# Altium PCB realy_ac_panel.PcbDoc
Units mm, origin at the board's own origin, x right, y up, seen from the top; angles counter-clockwise.
Board outline 129 x 103 mm, 6 copper layers (Top Layer, GND, Inner, Inner2, Power, Bottom Layer), stack 0.815 mm thick; 6 components, 77 nets, 6 pads, 4 vias.
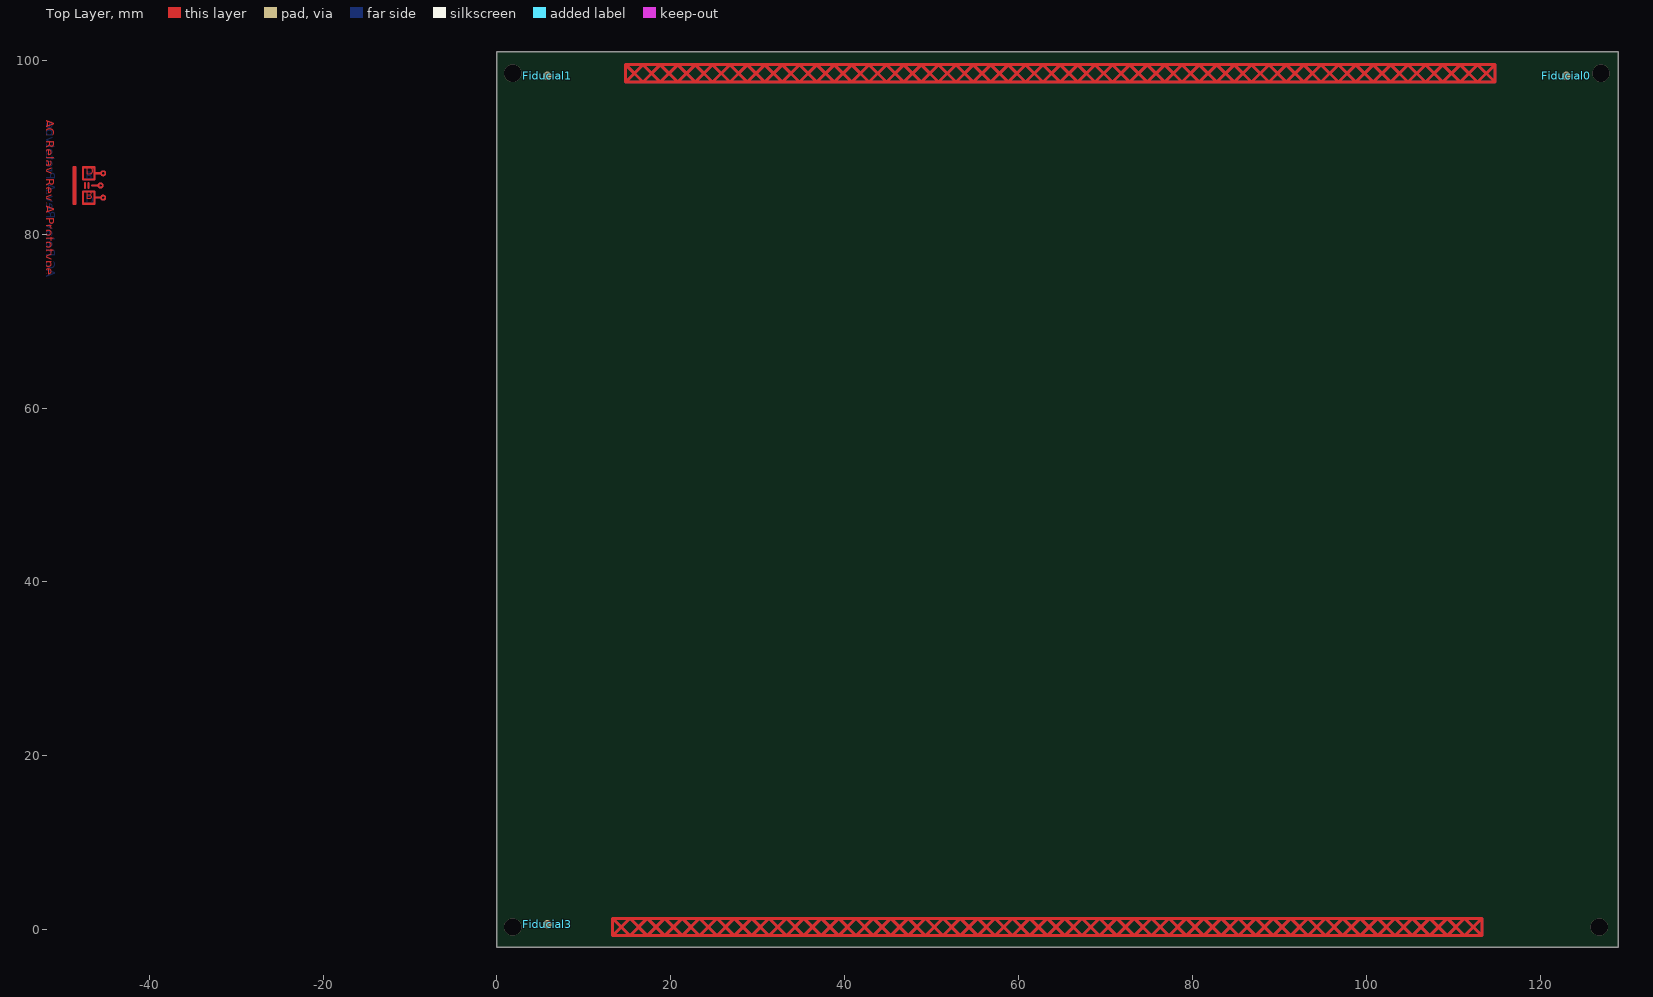
[diagram p0: Top Layer view]
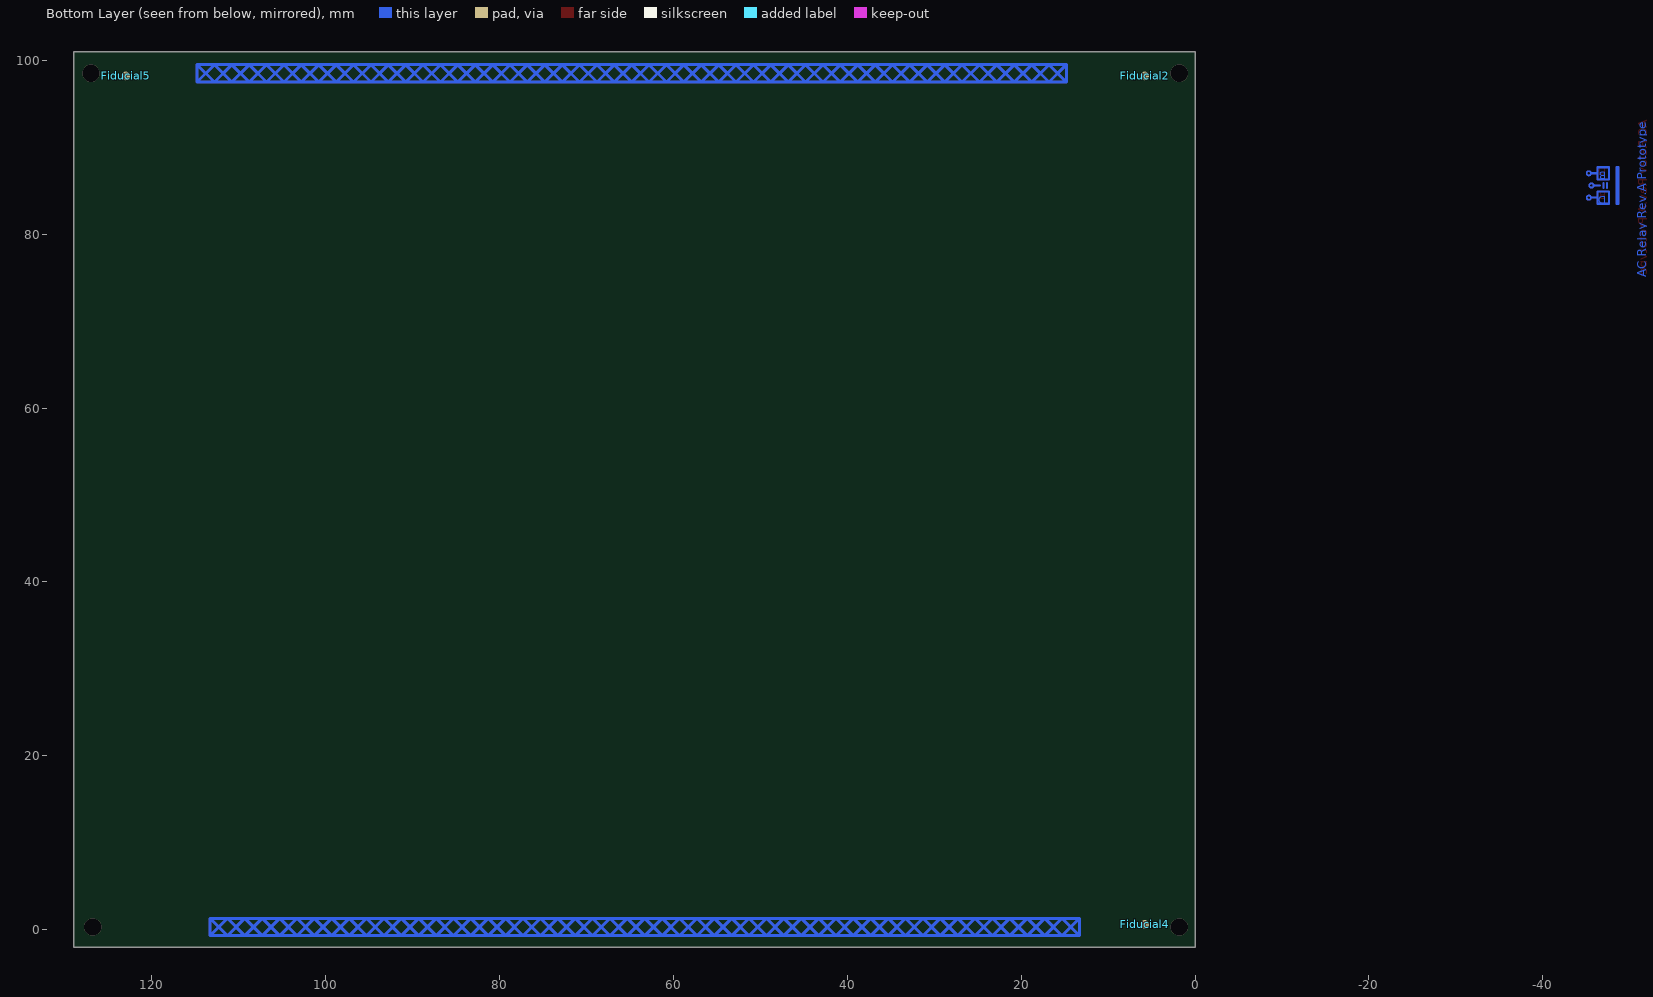
[diagram p1: Bottom Layer view, seen from below]
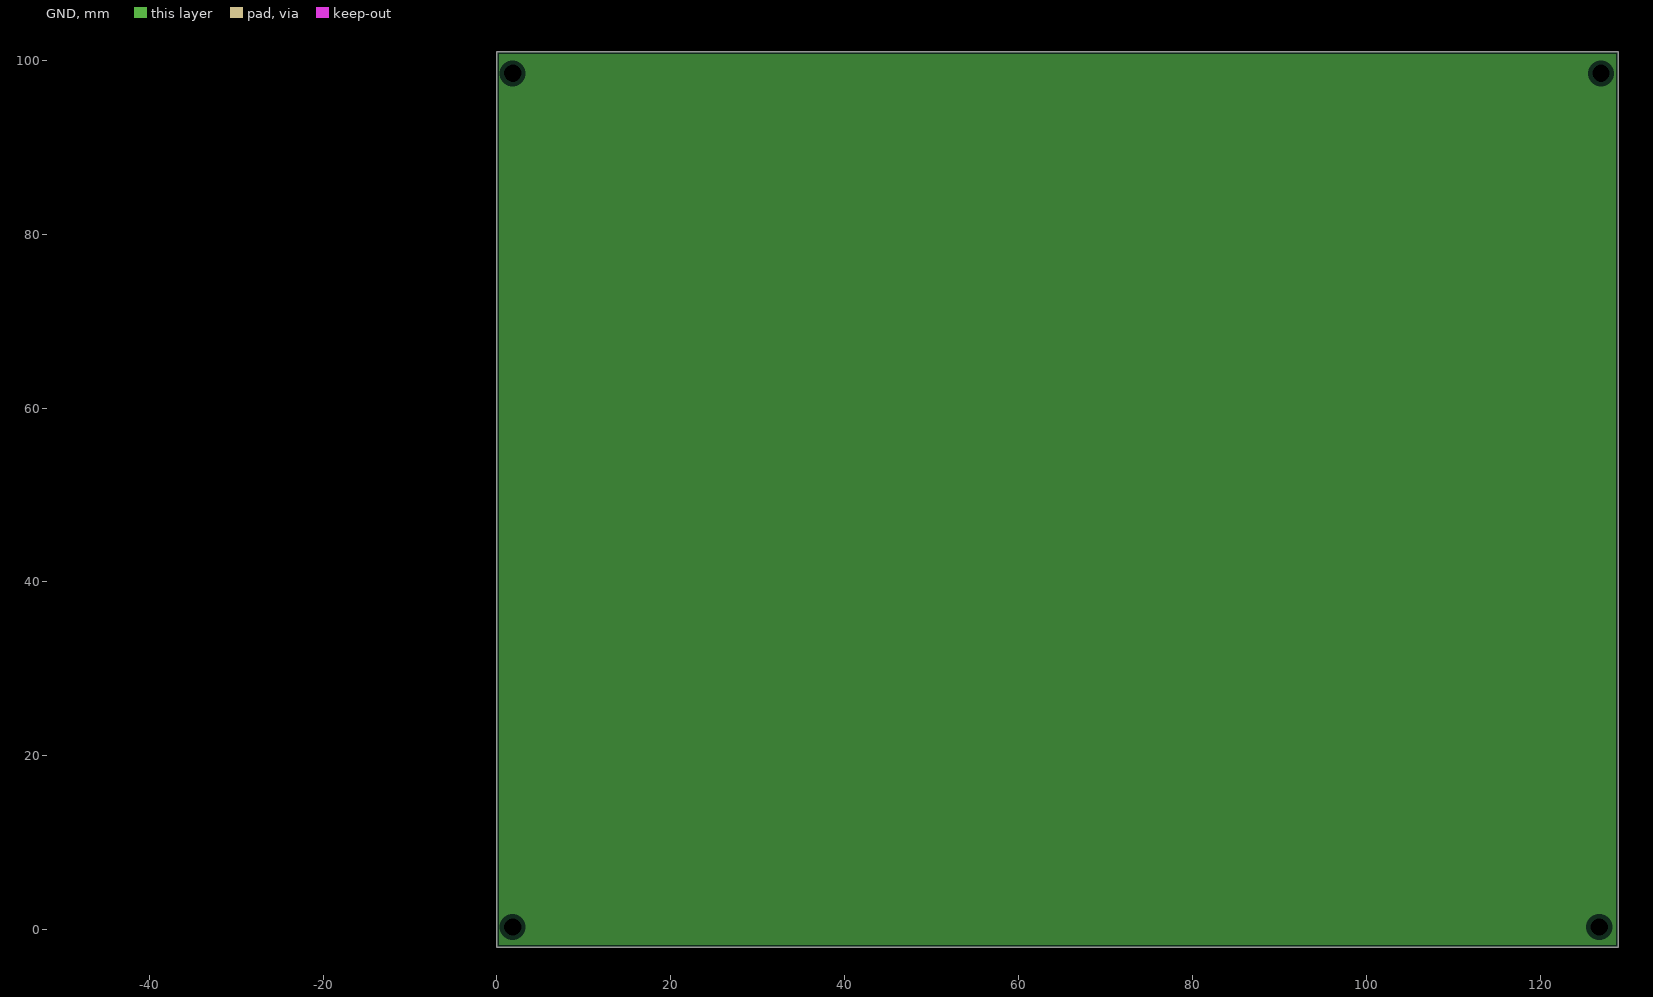
[diagram p2: GND, clearances drawn from the general rule]
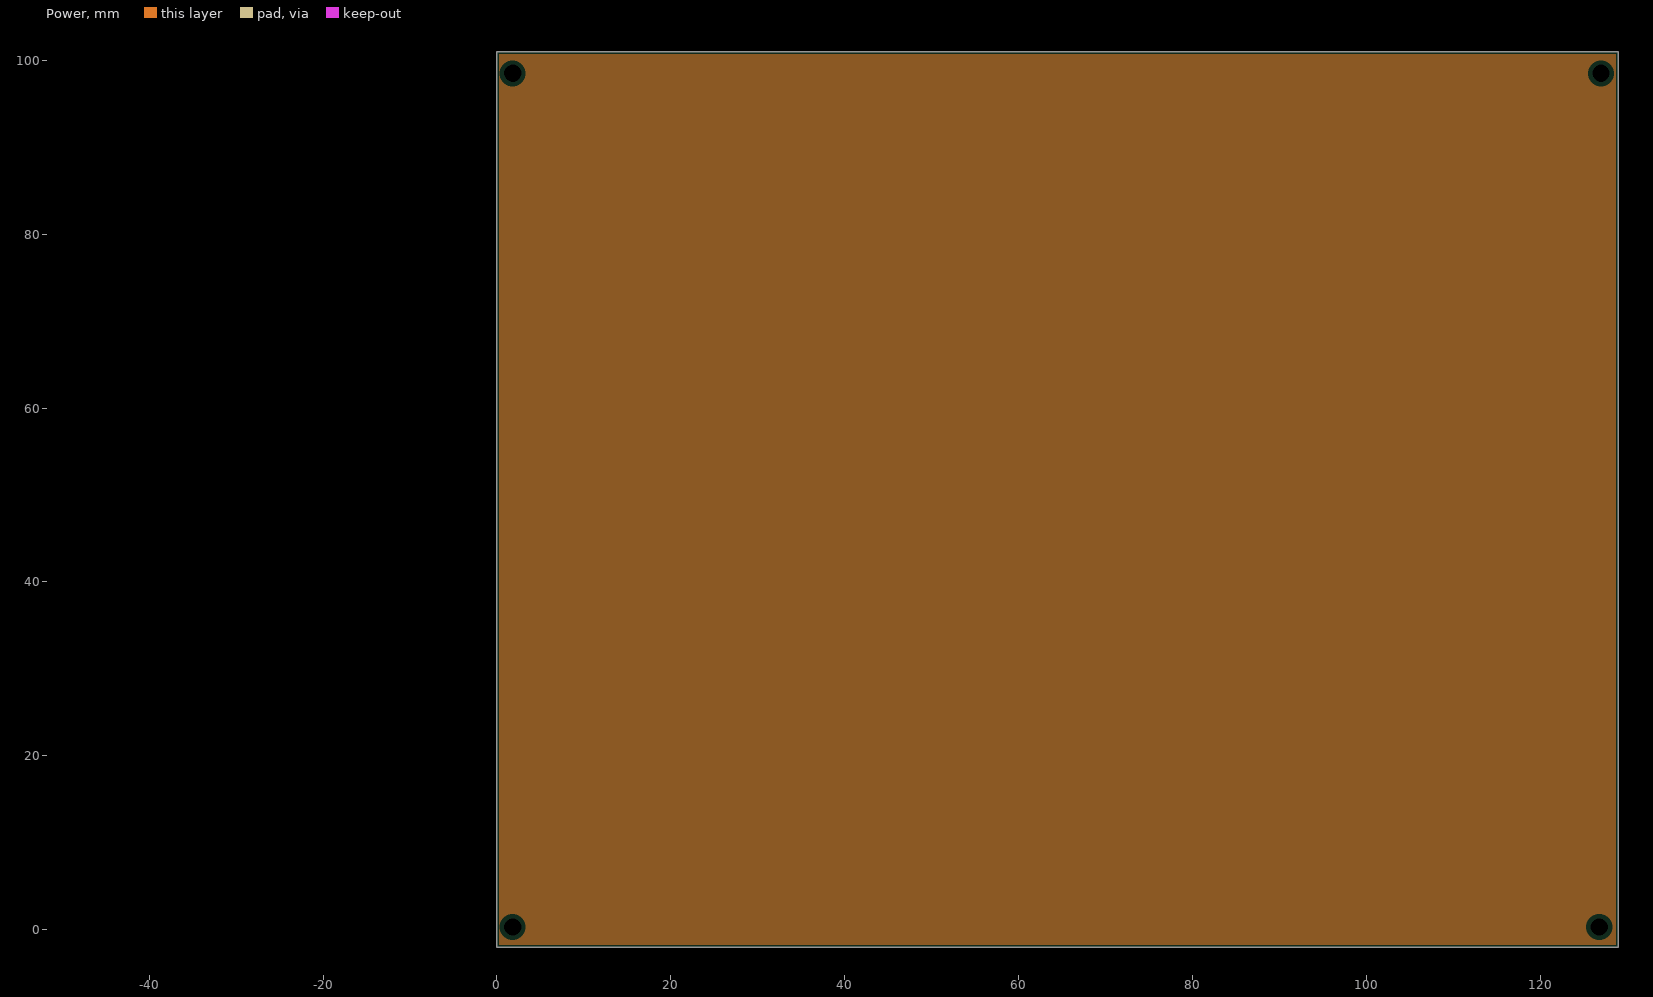
[diagram p3: Power, clearances drawn from the general rule]

## Layer stack, top to bottom
Top Solder: solder mask 0.0102, Solder Resist, Dk 3.5
Top Layer: signal copper 0.035
Dielectric1: prepreg 0.1042, IT180A 3310, Dk 4.15
GND: plane copper 0.018, net (Multiple Nets)
Dielectric5: core 0.13, IT180A FR-4, Dk 4.25
Inner: signal copper 0.018
Dielectric3: prepreg 0.2043, IT180A 3310, Dk 4.15
Inner2: signal copper 0.018
Dielectric2: core 0.13, IT180A FR-4, Dk 4.25
Power: plane copper 0.018, net (Multiple Nets)
Dielectric4: prepreg 0.1042, IT180A 3310, Dk 4.15
Bottom Layer: signal copper 0.035
Bottom Solder: solder mask 0.0102, Solder Resist, Dk 3.5

## Board outline
0,-2 0,101 129,101 129,-2

## Design rules (kind name [scope] priority, off if disabled: settings)
Clearance Clearance_eth_hole [(ObjectKind = 'Pad') And ((Name = 'J1-MH1') or (Name = 'J1-MH2'))] p1: gap=0 ignorepadtopadclearanceinfootprint=FALSE
Clearance Clearance_shld [InNet('SHLD') and InPolygon] p2: gap=0.9 ignorepadtopadclearanceinfootprint=FALSE
Clearance Clearance_gnd_planes [InPolygon and InNet('GND')] p3: gap=0.45 ignorepadtopadclearanceinfootprint=FALSE
Clearance Clearance_poe_vin [InNetClass('poe_vin') vs InPolygon] p4: gap=0.85 ignorepadtopadclearanceinfootprint=FALSE
Clearance Clearance_015 [InComponentClass('015')] p5: gap=0.15 ignorepadtopadclearanceinfootprint=FALSE
Clearance Clearance_diff_eth [InDifferentialPairClass('eth') vs not OnLayer('Keep-Out Layer')] p6: gap=0.35 ignorepadtopadclearanceinfootprint=FALSE except(0.45: Arc-Fill Arc-Poly Arc-Region Track-Fill Track-Poly Track-Region SMDPad-Fill SMDPad-Poly SMDPad-Region THPad-Fill THPad-Poly THPad-Region Via-Fill Via-Poly Via-Region Fill-Fill Fill-Poly Fill-Region Poly-Poly Poly-Region Region-Region)
Clearance Clearance_diff_eth_same [InDifferentialPairClass('eth')] p7: gap=0.15 ignorepadtopadclearanceinfootprint=FALSE
Clearance Clearance_diff_usb_same [InDifferentialPairClass('usb')] p8: gap=0.2 ignorepadtopadclearanceinfootprint=FALSE
Clearance [All vs not InAnyDifferentialPair] p9: gap=0.25 ignorepadtopadclearanceinfootprint=FALSE
ComponentClearance ComponentClearance_con [InComponent('J2') vs InComponent('J3')] p1: gap=0 collisioncheckmode=3 verticalgap=0 showdistances=FALSE
ComponentClearance ComponentClearance_con_1 [InComponent('J4') vs InComponent('J5')] p2: gap=0 collisioncheckmode=3 verticalgap=0 showdistances=FALSE
ComponentClearance ComponentClearance_con_2 [InComponent('J8') vs InComponent('J4')] p3: gap=0 collisioncheckmode=3 verticalgap=0 showdistances=FALSE
ComponentClearance ComponentClearance_logo [HasFootprint('Develer_logo_30x12mm_PCB_NOTE') vs HasFootprint('Develer_logo_30x12mm_TB_Top')] p4: gap=0 collisioncheckmode=3 verticalgap=0 showdistances=FALSE
ComponentClearance [All] p5: gap=0.25 collisioncheckmode=3 verticalgap=0.25 showdistances=FALSE
DiffPairsRouting DiffPairsRouting_eth [InDifferentialPair('ETHCONN-RX', 'ETHCONN-TX')] p1: maxlimit=0.15 minlimit=0.15 mostfreqgap=0.15 toplayer_minwidth=0.16 toplayer_maxwidth=0.16 toplayer_prefwidth=0.16 midlayer1_minwidth=0.16 midlayer1_maxwidth=0.16 midlayer1_prefwidth=0.16 midlayer2_minwidth=0.16 midlayer2_maxwidth=0.16 midlayer2_prefwidth=0.16 bottomlayer_minwidth=0.16 bottomlayer_maxwidth=0.16 bottomlayer_prefwidth=0.16 maxuncoupledlength=12.7
DiffPairsRouting DiffPairsRouting_eth_1 [InDifferentialPair('ETHRX', 'ETHTX')] p2: maxlimit=0.15 minlimit=0.15 mostfreqgap=0.15 toplayer_minwidth=0.16 toplayer_maxwidth=0.16 toplayer_prefwidth=0.16 midlayer1_minwidth=0.16 midlayer1_maxwidth=0.16 midlayer1_prefwidth=0.16 midlayer2_minwidth=0.16 midlayer2_maxwidth=0.16 midlayer2_prefwidth=0.16 bottomlayer_minwidth=0.16 bottomlayer_maxwidth=0.16 bottomlayer_prefwidth=0.16 maxuncoupledlength=12.7
DiffPairsRouting DiffPairsRouting_usb [InDifferentialPair('USBA', 'usbb')] p3: maxlimit=0.35 minlimit=0.2 mostfreqgap=0.2 toplayer_minwidth=0.22 toplayer_maxwidth=0.22 toplayer_prefwidth=0.22 midlayer1_minwidth=0.22 midlayer1_maxwidth=0.22 midlayer1_prefwidth=0.22 midlayer2_minwidth=0.22 midlayer2_maxwidth=0.22 midlayer2_prefwidth=0.22 bottomlayer_minwidth=0.22 bottomlayer_maxwidth=0.22 bottomlayer_prefwidth=0.22 maxuncoupledlength=2.7
Height [All] p1: minheight=0 maxheight=25 prefheight=12.5
HoleSize [All] p1: absolutevalues=TRUE maxlimit=10 minlimit=0.2 maxpercent=80.000 minpercent=20.000
HoleToHoleClearance [All] p1: gap=0.25 allowstackedmicrovias=TRUE
MatchedLengths MatchedLengths_usb [InDifferentialPair('USBA', 'usbb')] p1: tolerance=0.25 checknetsindiffpair=TRUE checkdiffpairvsdiffpair=FALSE checkxsignals=FALSE checkothers=FALSE
MatchedLengths MatchedLengths_eth [InDifferentialPair('ETHCONN-RX', 'ETHCONN-TX')] p2: tolerance=0.25 checknetsindiffpair=FALSE checkdiffpairvsdiffpair=TRUE checkxsignals=TRUE checkothers=TRUE
MatchedLengths MatchedLengths_eth_2 [InDifferentialPair('ETHRX', 'ETHTX')] p3: tolerance=0.25 checknetsindiffpair=FALSE checkdiffpairvsdiffpair=TRUE checkxsignals=TRUE checkothers=TRUE
MatchedLengths MatchedLengths_eth_1 [InDifferentialPair('ETHCONN-RX', 'ETHCONN-TX')] p4: tolerance=0.2 checknetsindiffpair=TRUE checkdiffpairvsdiffpair=FALSE checkxsignals=FALSE checkothers=FALSE
MatchedLengths MatchedLengths_eth_3 [InDifferentialPair('ETHRX', 'ETHTX')] p5: tolerance=0.2 checknetsindiffpair=TRUE checkdiffpairvsdiffpair=FALSE checkxsignals=FALSE checkothers=FALSE
MinimumSolderMaskSliver MinimumSolderMaskSliver_firma [HasFootprint('db_firma')] p1: minsoldermaskwidth=0
MinimumSolderMaskSliver [All] p2: minsoldermaskwidth=0.1
PlaneClearance PlaneClearance_poe_vin [InNetClass('poe_vin')] p1: clearance=0.65
PlaneClearance [All] p2: clearance=0.5
PlaneConnect PlaneConnect_poe [(ObjectKind = 'Pad') And (Name = 'U1-21')] p1: planeconnectstyle=Direct reliefexpansion=0.508 reliefentries=4 reliefconductorwidth=0.254 reliefairgap=0.254
PlaneConnect PlaneConnect_via [isvia] p2: planeconnectstyle=Direct reliefexpansion=0.508 reliefentries=4 reliefconductorwidth=0.254 reliefairgap=0.254
PlaneConnect [All] p3: planeconnectstyle=Relief reliefexpansion=0.3 reliefentries=4 reliefconductorwidth=0.3 reliefairgap=0.15
PolygonConnect PolygonConnect_1 [(ObjectKind = 'Pad') And (Name = 'U1-21')] p1: connectstyle=Direct reliefconductorwidth=0.254 reliefentries=4 polygonreliefangle="90 Angle" airgapwidth=0.254
PolygonConnect PolygonConnect_via [isvia] p2: connectstyle=Direct reliefconductorwidth=0.254 reliefentries=4 polygonreliefangle="90 Angle" airgapwidth=0.254
PolygonConnect [All] p3: connectstyle=Relief reliefconductorwidth=0.15 reliefentries=4 polygonreliefangle="90 Angle" airgapwidth=0.15
RoutingCorners [All] p1: cornerstyle=45-Degree minsetback=2.5 maxsetback=2.5
RoutingVias [All] p1: holewidth=0.3 width=0.6 viastyle="Through Hole" minholewidth=0.2 minwidth=0.3 maxholewidth=0.5 maxwidth=1
ShortCircuit ShortCircuit_eth_hole [(ObjectKind = 'Pad') And ((Name = 'J1-MH1') or (Name = 'J1-MH2'))] p1: allowed=TRUE
ShortCircuit [All] p2: allowed=FALSE
SilkToSilkClearance [All] p1: silktosilkclearance=0.15
SilkToSolderMaskClearance [IsPad] p1: minsilkscreentomaskgap=0.15 clearancetoexposedcopper=TRUE
SolderMaskExpansion SolderMaskExpansion_via [isVia] p1: expansion=-10 istentingtop=FALSE
SolderMaskExpansion [All] p2: expansion=0.05 istentingtop=FALSE
UnRoutedNet [All] p1: checkbadconnections=TRUE
Width [All] p1: maxlimit=5 minlimit=0.15 preferedwidth=0.25
17 further rules are at their usual default settings.

## Classes and differential pairs
net class diffpair: ETH_VDDA ETHCONN-RX_N ETHCONN-RX_P ETHCONN-TX_N ETHCONN-TX_P ETHRX_N ETHRX_P ETHTX_N ETHTX_P NetC27_2 NetC28_2 USBA_N USBA_P USBB_N USBB_P
net class poe_vin: CT1VC+ CT2VC- SP1VC+ SP2VC-
differential pair class usb: USBA USBB
differential pair class eth: ETHCONN-RX ETHCONN-TX ETHRX ETHTX
net class usb_diff: USBA_N USBA_P USBB_N USBB_P
component class usb: U?
differential pair ETHTX: +ETHTX_P -ETHTX_N
differential pair ETHRX: +ETHRX_P -ETHRX_N
differential pair USBB: +USBB_P -USBB_N
differential pair USBA: +USBA_P -USBA_N
differential pair ETHCONN-TX: +ETHCONN-TX_P -ETHCONN-TX_N
differential pair ETHCONN-RX: +ETHCONN-RX_P -ETHCONN-RX_N

## Components (designator, comment, footprint, x,y, rotation, side; value= is the part's Value field where it differs from the comment)
Fiducial0 "Comment" Fiducial_mark_nosilk 123,98.2 r0 top
Fiducial1 "Comment" Fiducial_mark_nosilk 5.8,98.2 r0 top
Fiducial2 "Comment" Fiducial_mark_nosilk 5.8,98.2 r0 bottom
Fiducial3 "Comment" Fiducial_mark_nosilk 5.8,0.6 r0 top
Fiducial4 "Comment" Fiducial_mark_nosilk 5.8,0.6 r0 bottom
Fiducial5 "Comment" Fiducial_mark_nosilk 123,98.2 r0 bottom

## Footprints (in the part's own frame and the unit in brackets; to place one, negate y for a bottom-side part, rotate by r counter-clockwise, add the part's x,y. Pads: shape width x height; smd on the part's side, far side on the other; paste and mask are expansions set on the pad)
Fiducial_mark_nosilk [mm]
  round 1 smd mask+1: "Fiducial Mark"(0,0)

## Via types
v1: diameter 2, hole 2, Top Layer to Bottom Layer, tented both sides, 4 vias

## Nets (pads, with @x,y where several pads share a name; then routed paths per layer and width w, separated by ;. In a path a pad name is that pad's centre, name@x,y a point inside that pad or via, vN(x,y) a via of type N, cw(c..) or ccw(c..) an arc to the next point about the centre after c; other vN are vias at no path point)
CT1VC+: 
CT2VC-: 
ETH_VDD: 
ETH_VDDA: 
ETHCONN-RX_N: 
ETHCONN-RX_P: 
ETHCONN-TX_N: 
ETHCONN-TX_P: 
ETHRX_N: 
ETHRX_P: 
ETHTX_N: 
ETHTX_P: 
FB: 
GND: 
LED_ACT: 
LED_LINK: 
NetC5_2: 
NetC7_2: 
NetC9_2: 
NetC10_2: 
NetC11_2: 
NetC25_1: 
NetC25_2: 
NetC26_1: 
NetC26_2: 
NetC27_1: 
NetC27_2: 
NetC28_1: 
NetC28_2: 
NetD1_1: 
NetD3_1: 
NetD4_2: 
NetD5_2: 
NetJ2_3: 
NetJ2_4: 
NetJ2_5: 
NetJ2_6: 
NetJ2_7: 
NetJ2_8: 
NetJ2_9: 
NetJ2_10: 
NetJ2_11: 
NetJ2_12: 
NetJ2_13: 
NetJ2_14: 
NetJ3_1: 
NetJ3_2: 
NetJ3_3: 
NetJ3_4: 
NetJ3_5: 
NetJ3_6: 
NetJ3_7: 
NetJ3_8: 
NetJ4_4: 
NetJ4_6: 
NetJ4_10: 
NetJ7_2: 
NetJ7_3: 
NetL11_2: 
NetR7_1: 
NetR9_2: 
NetR11_2: 
NetR24_2: 
SHLD: 
SP1VC+: 
SP2VC-: 
SWO: 
to_shield: 
USBA_N: 
USBA_P: 
USBB_N: 
USBB_P: 
VDD_BUS: 
Vneg: 
Vpos: 
Vss: 
VSYS_5V: 
pads on no net: "Fiducial0.Fiducial Mark" "Fiducial1.Fiducial Mark" "Fiducial2.Fiducial Mark" "Fiducial3.Fiducial Mark" "Fiducial4.Fiducial Mark" "Fiducial5.Fiducial Mark"
copper on no net: | length 2210.6
  Top Layer w0.2: -45.35,85.6 ccw(c-45.6,85.6) -45.35,85.6 ; -45.05,84.2 ccw(c-45.3,84.2) -45.05,84.2 ; -45.05,87 ccw(c-45.3,87) -45.05,87
  Top Layer w0.25: -47.4,85.3 -47.4,85.9 ; -47,85.3 -47,85.9 ; -46.6,85.6 -45.9,85.6 ; -46.3,84.2 -45.6,84.2 ; -46.3,87 -45.6,87 ; -48.7,83.5 -48.7,87.7 -48.5,87.7 -48.5,83.5 -48.7,83.5 ; -47.6,83.5 -46.3,83.5 -46.3,84.9 -47.6,84.9 -47.6,83.5 ; -47.6,86.3 -46.3,86.3 -46.3,87.7 -47.6,87.7 -47.6,86.3
  Top Layer w0.35: 13.3,-0.7 113.3,-0.7 ; 13.3,-0.7 13.3,1.3 ; 13.3,-0.7 13.3,1.3 ; 13.3,-0.7 15.3,1.3 17.3,-0.7 19.3,1.3 21.3,-0.7 23.3,1.3 25.3,-0.7 27.3,1.3 29.3,-0.7 31.3,1.3 33.3,-0.7 35.3,1.3 37.3,-0.7 39.3,1.3 41.3,-0.7 43.3,1.3 45.3,-0.7 47.3,1.3 49.3,-0.7 51.3,1.3 53.3,-0.7 55.3,1.3 57.3,-0.7 59.3,1.3 61.3,-0.7 63.3,1.3 65.3,-0.7 67.3,1.3 69.3,-0.7 71.3,1.3 73.3,-0.7 75.3,1.3 77.3,-0.7 79.3,1.3 81.3,-0.7 83.3,1.3 85.3,-0.7 87.3,1.3 89.3,-0.7 91.3,1.3 93.3,-0.7 95.3,1.3 97.3,-0.7 99.3,1.3 101.3,-0.7 103.3,1.3 105.3,-0.7 107.3,1.3 109.3,-0.7 111.3,1.3 113.3,-0.7 ; 13.3,1.3 113.3,1.3 ; 13.3,1.3 113.3,1.3 ; 13.3,1.3 15.3,-0.7 17.3,1.3 19.3,-0.7 21.3,1.3 23.3,-0.7 25.3,1.3 27.3,-0.7 29.3,1.3 31.3,-0.7 33.3,1.3 35.3,-0.7 37.3,1.3 39.3,-0.7 41.3,1.3 43.3,-0.7 45.3,1.3 47.3,-0.7 49.3,1.3 51.3,-0.7 53.3,1.3 55.3,-0.7 57.3,1.3 59.3,-0.7 61.3,1.3 63.3,-0.7 65.3,1.3 67.3,-0.7 69.3,1.3 71.3,-0.7 73.3,1.3 75.3,-0.7 77.3,1.3 79.3,-0.7 81.3,1.3 83.3,-0.7 85.3,1.3 87.3,-0.7 89.3,1.3 91.3,-0.7 93.3,1.3 95.3,-0.7 97.3,1.3 99.3,-0.7 101.3,1.3 103.3,-0.7 105.3,1.3 107.3,-0.7 109.3,1.3 111.3,-0.7 113.3,1.3 ; 14.8,97.5 16.8,99.5 18.8,97.5 20.8,99.5 22.8,97.5 24.8,99.5 26.8,97.5 28.8,99.5 30.8,97.5 32.8,99.5 34.8,97.5 36.8,99.5 38.8,97.5 40.8,99.5 42.8,97.5 44.8,99.5 46.8,97.5 48.8,99.5 50.8,97.5 52.8,99.5 54.8,97.5 56.8,99.5 58.8,97.5 60.8,99.5 62.8,97.5 64.8,99.5 66.8,97.5 68.8,99.5 70.8,97.5 72.8,99.5 74.8,97.5 76.8,99.5 78.8,97.5 80.8,99.5 82.8,97.5 84.8,99.5 86.8,97.5 88.8,99.5 90.8,97.5 92.8,99.5 94.8,97.5 96.8,99.5 98.8,97.5 100.8,99.5 102.8,97.5 104.8,99.5 106.8,97.5 108.8,99.5 110.8,97.5 112.8,99.5 114.8,97.5 ; 14.8,97.5 14.8,99.5 ; 14.8,97.5 114.8,97.5 ; 14.8,97.5 14.8,99.5 ; 14.8,97.5 114.8,97.5 ; 14.8,99.5 16.8,97.5 18.8,99.5 20.8,97.5 22.8,99.5 24.8,97.5 26.8,99.5 28.8,97.5 30.8,99.5 32.8,97.5 34.8,99.5 36.8,97.5 38.8,99.5 40.8,97.5 42.8,99.5 44.8,97.5 46.8,99.5 48.8,97.5 50.8,99.5 52.8,97.5 54.8,99.5 56.8,97.5 58.8,99.5 60.8,97.5 62.8,99.5 64.8,97.5 66.8,99.5 68.8,97.5 70.8,99.5 72.8,97.5 74.8,99.5 76.8,97.5 78.8,99.5 80.8,97.5 82.8,99.5 84.8,97.5 86.8,99.5 88.8,97.5 90.8,99.5 92.8,97.5 94.8,99.5 96.8,97.5 98.8,99.5 100.8,97.5 102.8,99.5 104.8,97.5 106.8,99.5 108.8,97.5 110.8,99.5 112.8,97.5 114.8,99.5 ; 14.8,99.5 114.8,99.5 ; 113.3,-0.7 113.3,1.3 ; 114.8,97.5 114.8,99.5
  Bottom Layer w0.2: -45.35,85.6 ccw(c-45.6,85.6) -45.35,85.6 ; -45.05,84.2 ccw(c-45.3,84.2) -45.05,84.2 ; -45.05,87 ccw(c-45.3,87) -45.05,87
  Bottom Layer w0.25: -47.4,85.3 -47.4,85.9 ; -47,85.3 -47,85.9 ; -46.6,85.6 -45.9,85.6 ; -46.3,84.2 -45.6,84.2 ; -46.3,87 -45.6,87 ; -48.7,83.5 -48.7,87.7 -48.5,87.7 -48.5,83.5 -48.7,83.5 ; -47.6,83.5 -47.6,84.9 -46.3,84.9 -46.3,83.5 -47.6,83.5 ; -47.6,86.3 -47.6,87.7 -46.3,87.7 -46.3,86.3 -47.6,86.3
  Bottom Layer w0.35: 92.8,97.5 90.8,99.5 88.8,97.5 86.8,99.5 84.8,97.5 82.8,99.5 80.8,97.5 78.8,99.5 76.8,97.5 74.8,99.5 72.8,97.5 70.8,99.5 68.8,97.5 66.8,99.5 64.8,97.5 62.8,99.5 60.8,97.5 58.8,99.5 56.8,97.5 54.8,99.5 52.8,97.5 50.8,99.5 48.8,97.5 46.8,99.5 44.8,97.5 42.8,99.5 40.8,97.5 38.8,99.5 36.8,97.5 34.8,99.5 32.8,97.5 30.8,99.5 28.8,97.5 26.8,99.5 24.8,97.5 22.8,99.5 20.8,97.5 18.8,99.5 16.8,97.5 14.8,99.5 ; 92.8,99.5 94.8,97.5 96.8,99.5 98.8,97.5 100.8,99.5 102.8,97.5 104.8,99.5 106.8,97.5 108.8,99.5 110.8,97.5 112.8,99.5 114.8,97.5 ; 92.8,97.5 94.8,99.5 96.8,97.5 98.8,99.5 100.8,97.5 102.8,99.5 104.8,97.5 106.8,99.5 108.8,97.5 110.8,99.5 112.8,97.5 114.8,99.5 ; 92.8,99.5 90.8,97.5 88.8,99.5 86.8,97.5 84.8,99.5 82.8,97.5 80.8,99.5 78.8,97.5 76.8,99.5 74.8,97.5 72.8,99.5 70.8,97.5 68.8,99.5 66.8,97.5 64.8,99.5 62.8,97.5 60.8,99.5 58.8,97.5 56.8,99.5 54.8,97.5 52.8,99.5 50.8,97.5 48.8,99.5 46.8,97.5 44.8,99.5 42.8,97.5 40.8,99.5 38.8,97.5 36.8,99.5 34.8,97.5 32.8,99.5 30.8,97.5 28.8,99.5 26.8,97.5 24.8,99.5 22.8,97.5 20.8,99.5 18.8,97.5 16.8,99.5 14.8,97.5 ; 13.3,-0.7 113.3,-0.7 ; 13.3,-0.7 13.3,1.3 ; 13.3,-0.7 13.3,1.3 ; 13.3,-0.7 15.3,1.3 17.3,-0.7 19.3,1.3 21.3,-0.7 23.3,1.3 25.3,-0.7 27.3,1.3 29.3,-0.7 31.3,1.3 33.3,-0.7 35.3,1.3 37.3,-0.7 39.3,1.3 41.3,-0.7 43.3,1.3 45.3,-0.7 47.3,1.3 49.3,-0.7 51.3,1.3 53.3,-0.7 55.3,1.3 57.3,-0.7 59.3,1.3 61.3,-0.7 63.3,1.3 65.3,-0.7 67.3,1.3 69.3,-0.7 71.3,1.3 73.3,-0.7 75.3,1.3 77.3,-0.7 79.3,1.3 81.3,-0.7 83.3,1.3 85.3,-0.7 87.3,1.3 89.3,-0.7 91.3,1.3 93.3,-0.7 95.3,1.3 97.3,-0.7 99.3,1.3 101.3,-0.7 103.3,1.3 105.3,-0.7 107.3,1.3 109.3,-0.7 111.3,1.3 113.3,-0.7 ; 13.3,1.3 113.3,1.3 ; 13.3,1.3 15.3,-0.7 17.3,1.3 19.3,-0.7 21.3,1.3 23.3,-0.7 25.3,1.3 27.3,-0.7 29.3,1.3 31.3,-0.7 33.3,1.3 35.3,-0.7 37.3,1.3 39.3,-0.7 41.3,1.3 43.3,-0.7 45.3,1.3 47.3,-0.7 49.3,1.3 51.3,-0.7 53.3,1.3 55.3,-0.7 57.3,1.3 59.3,-0.7 61.3,1.3 63.3,-0.7 65.3,1.3 67.3,-0.7 69.3,1.3 71.3,-0.7 73.3,1.3 75.3,-0.7 77.3,1.3 79.3,-0.7 81.3,1.3 83.3,-0.7 85.3,1.3 87.3,-0.7 89.3,1.3 91.3,-0.7 93.3,1.3 95.3,-0.7 97.3,1.3 99.3,-0.7 101.3,1.3 103.3,-0.7 105.3,1.3 107.3,-0.7 109.3,1.3 111.3,-0.7 113.3,1.3 ; 14.8,97.5 14.8,99.5 ; 14.8,97.5 14.8,99.5 ; 14.8,97.5 114.8,97.5 ; 14.8,99.5 114.8,99.5 ; 113.3,-0.7 113.3,1.3 ; 114.8,97.5 114.8,99.5
  other v1: 1.8,0.3 126.8,0.3 1.8,98.5 127,98.5

## Polygon pours and split planes (outlines as drawn)
Vneg on Top Layer "VNEG_L01_P188" (solid, remove dead copper, pour order 188): 4.3,60.3
GND on GND (split plane): 128.748,-1.748 0.252,-1.748 0.252,100.748 128.748,100.748
NetC27_2 on Power (split plane): 128.748,-1.748 0.252,-1.748 0.252,100.748 128.748,100.748

## Other copper
Top Layer:
  text "AC Relay Rev.A Prototype" at -52.019,93.15 h1 r270
  text "D" at -47.3,86.525 h1.5
  text "B" at -47.3,83.725 h1.5
Bottom Layer:
  text "B" at -47.3,87.475 h1.5 r180
  text "D" at -47.3,84.675 h1.5 r180
  text "15-Jul-20" at -60.8,81.7 h1 r270
  text "Plot_File_Name is not interpreted until output" at -58.787,81.7 h1 r270
  text "AC Relay Rev.A Prototype" at -51.906,75.05 h1 r270

## Silkscreen, mask and mechanical layers (free items; w line width, h text height)
Outline:
  the board outline again, w0.1
Assembly Top:
  text "'.Layer_Name'" at 87.202,-127 h5
  text "'.Layer_Name'" at 781.702,-138.5 h5
Assembly Bottom:
  text "'.Layer_Name'" at -82.626,-126.929 h5
Note Top:
  text "'.Layer_Name'" at 91.818,-127 h5
  text "'.Layer_Name'" at 786.318,-138.5 h5
Note Bottom:
  text "'.Layer_Name'" at -86.518,-126.929 h5
Drill Drawing:
  lines w0.254: -141.494,-60.518 -140.021,-60.518 -140.021,-59.045 -141.494,-59.045 -141.494,-60.518 ; -141.199,-60.223 -140.316,-60.223 -140.316,-59.34 -141.199,-59.34 -141.199,-60.223
  lines w0.35: -142.825,-61.512 6.402,-61.512 ; -142.825,-58.198 6.402,-58.198 ; -133.824,-64.825 -133.824,-54.885 ; -126.986,-64.825 -126.986,-54.885 ; -112.012,-64.825 -112.012,-54.885 ; -105.11,-64.825 -105.11,-54.885 ; -95.119,-64.825 -95.119,-54.885 ; -75.817,-64.825 -75.817,-54.885 ; -67.74,-64.825 -67.74,-54.885 ; -57.176,-64.825 -57.176,-54.885 ; -38.728,-64.825 -38.728,-54.885 ; -27.545,-64.825 -27.545,-54.885 ; -10.853,-64.825 -10.853,-54.885 ; -142.825,-64.825 6.402,-64.825 6.402,-54.885 -142.825,-54.885 -142.825,-64.825
  text "Symbol" at -140.837,-57.204 h1.92
  text "Count" at -132.83,-57.204 h1.92
  text "Hole Size" at -125.992,-57.204 h1.92
  text "Plated" at -111.018,-57.204 h1.92
  text "Hole Type" at -104.116,-57.204 h1.92
  text "Drill Layer Pair" at -94.125,-57.204 h1.92
  text "Via/Pad" at -74.823,-57.204 h1.92
  text "Pad Shape" at -66.746,-57.204 h1.92
  text "Template" at -56.182,-57.204 h1.92
  text "Description" at -37.734,-57.204 h1.92
  text "Hole Tolerance (+)" at -26.551,-57.204 h1.92
  text "Hole Tolerance (-)" at -9.859,-57.204 h1.92
  text "4" at -132.83,-60.518 h1.6
  text "78,74mil (2,000mm)" at -125.992,-60.518 h1.6
  text "PTH" at -111.018,-60.518 h1.6
  text "Round" at -104.116,-60.518 h1.6
  text "Top Layer - Bottom Layer" at -94.125,-60.518 h1.6
  text "Via" at -74.823,-60.518 h1.6
  text "Rounded" at -66.746,-60.518 h1.6
  text "v200h200m0mx0(Tol0-0)" at -56.182,-60.518 h1.6
  text "0,00mil (0,000mm)" at -26.551,-60.518 h1.6
  text "0,00mil (0,000mm)" at -9.859,-60.518 h1.6
  text "4 Total" at -132.83,-63.831 h1.6
PCB_Note_Panel:
  drawing of 106 lines, arcs and shapes, not listed
  text "A" at -160.5,171.5 h1.5
  text "B" at -128.5,171.5 h1.5
  text "C" at -99.014,171.5 h1.5
  text "D" at -69.529,171.5 h1.5
  text "E" at -40.043,171.5 h1.5
  text "F" at -10.558,171.5 h1.5
  text "G" at 18.928,171.5 h1.5
  text "H" at 48.319,171.5 h1.5
  text "I" at 77.805,171.5 h1.5
  text "J" at 107.29,171.5 h1.5
  text "K" at 136.957,171.5 h1.5
  text "L" at 166.442,171.5 h1.5
  text "M" at 195.928,171.5 h1.5
  text "N" at 225.414,171.5 h1.5
  text "10" at -172.5,161.5 h1.5 r90
  text "10" at 241.5,161.447 h1.5 r270
  text "PCB Build Notes:" at -155.5,156 h3
  text "PCB Build Notes:" at -155.5,156 h3
  text "1. Layers: 2" at -151.95,150.53 h2.5
  text "2. Base Material: FR4-Standard Tg 130-140C" at -151.95,145.739 h2.5
  text "3. Plating Finish: HASL" at -151.95,140.947 h2.5
  text "4. Silkscreen Color: .WHITE" at -151.95,136.156 h2.5
  text "5. Solder Color: GREEN" at -151.95,132.316 h2.5
  text "9" at -172.5,131.889 h1.5 r90
  text "9" at 241.5,131.836 h1.5 r270
  text "Other Notes:" at -155.5,123.6 h3
  text "Other Notes:" at -155.5,123.6 h3
  text "A  Differential Pair 90ohm +/- 10%" at -152.15,118.414 h2.5
  text "B  Single Ended 50ohm +/- 10%" at -152.05,113.799 h2.5
  text "C  Differential Pair 100ohm +/- 10%" at -152.15,109.307 h2.5
  text "8" at -172.5,102.278 h1.5 r90
  text "8" at 241.5,102.225 h1.5 r270
  text "7" at -172.5,72.667 h1.5 r90
  text "7" at 241.5,72.614 h1.5 r270
  text "6" at -172.5,43.056 h1.5 r90
  text "6" at 241.5,43.003 h1.5 r270
  text "5" at -172.5,13.444 h1.5 r90
  text "5" at 241.5,13.392 h1.5 r270
  text "4" at -172.5,-16.167 h1.5 r90
  text "4" at 241.5,-16.219 h1.5 r270
  text "3" at -172.5,-45.778 h1.5 r90
  text "3" at 241.5,-45.83 h1.5 r270
  text "2" at -172.5,-75.389 h1.5 r90
  text "2" at 241.5,-75.441 h1.5 r270
  text "Title: .prj_name_long" at 116.45,-89 h2.5
  text "Part No.: .prj_pn" at 183.431,-93.929 h1.8
  text "Board: .prj_name" at 116.5,-94 h2
  text "-  '.prj_status' -" at 156,-97.5 h2
  text "Variant: '.VariantName'" at 184.431,-98 h1.8
  text "'.Layer_Name'" at 118.002,-99 h5
  text "Author:" at 155.931,-101.929 h1.8
  text "Daniele Basile <asterix@develer.com>" at 174.931,-101.929 h1.8
  text "1" at -172.5,-105 h1.5 r90
  text "1" at 241.5,-105.053 h1.5 r270
  text "Approved by:" at 155.931,-105.929 h1.8
  text "Daniele Basile <asterix@develer.com>" at 174.931,-105.929 h1.8
  text "Prj Date: .prj_date" at 155.931,-109.929 h1.8
  text "Last Edit: '.Print_Date', '.Print_Time'" at 189.931,-109.929 h1.8
  text "PCB Revision: .prj_pcb" at 155.931,-113.929 h2
  text "'.Print_Scale'" at 189.931,-113.929 h2
  text "'.Print_Scale'" at 189.931,-113.929 h2
  text "PAGE SIZE A4" at 216.931,-113.929 h2
  text "PAGE SIZE A4" at 216.931,-113.929 h2
  text "A" at -160.5,-117 h1.5 r180
  text "B" at -128.5,-117 h1.5 r180
  text "C" at -99.014,-117 h1.5 r180
  text "D" at -69.529,-117 h1.5 r180
  text "E" at -40.043,-117 h1.5 r180
  text "F" at -10.558,-117 h1.5 r180
  text "G" at 18.928,-117 h1.5 r180
  text "H" at 48.319,-117 h1.5 r180
  text "I" at 77.805,-117 h1.5 r180
  text "J" at 107.29,-117 h1.5 r180
  text "K" at 136.957,-117 h1.5 r180
  text "L" at 166.442,-117 h1.5 r180
  text "M" at 195.928,-117 h1.5 r180
  text "N" at 225.414,-117 h1.5 r180
Route Tool Path:
  the board outline again, w0.3
V Cut:
  region: 51,144.5 54,143 57.125,146.125 54,137.5
  lines w0.25: 54,137.5 57.125,146.125 ; 54,137.5 54,143 ; 54,137.5 51,144.5 54,143 ; 54,143 57.125,146.125 ; 54,143 57.125,146.125
  lines w0.35: 0,5 129,5 ; 0,94 129,94
  lines w0.5: 64.5,-18.5 64.5,118
  lines w0.55: 54,133.5 54,158
  text "V-CUT" at 46,130.5 h5 r90

## Panel: embedded boards
"display.PcbDoc" at 64.5,109.4, 1 rows x 1 columns, spacing 63.5 x 38.1, rotation 270
"display.PcbDoc" at 64.5,5, 1 rows x 1 columns, spacing 63.5 x 38.1, rotation 90